# Altium PCB ZYNQ-HS-DEV-PCB.PcbDoc (part 9 of 10)
Units mm, origin at the board's own origin, x right, y up, seen from the top; angles counter-clockwise.
Board outline 125.25 x 111 mm, 10 copper layers (S1 (SIG), S2 (GND), S3 (SIG), S4 (GND), S5 (PWR), S6 (SIG), S7 (GND), S8 (SIG), S9 (GND), S10 (SIG)), stack 1.597 mm thick; 539 components, 408 nets, 2443 pads, 876 vias.
Unrouted connection lines stored in the file: 1310.
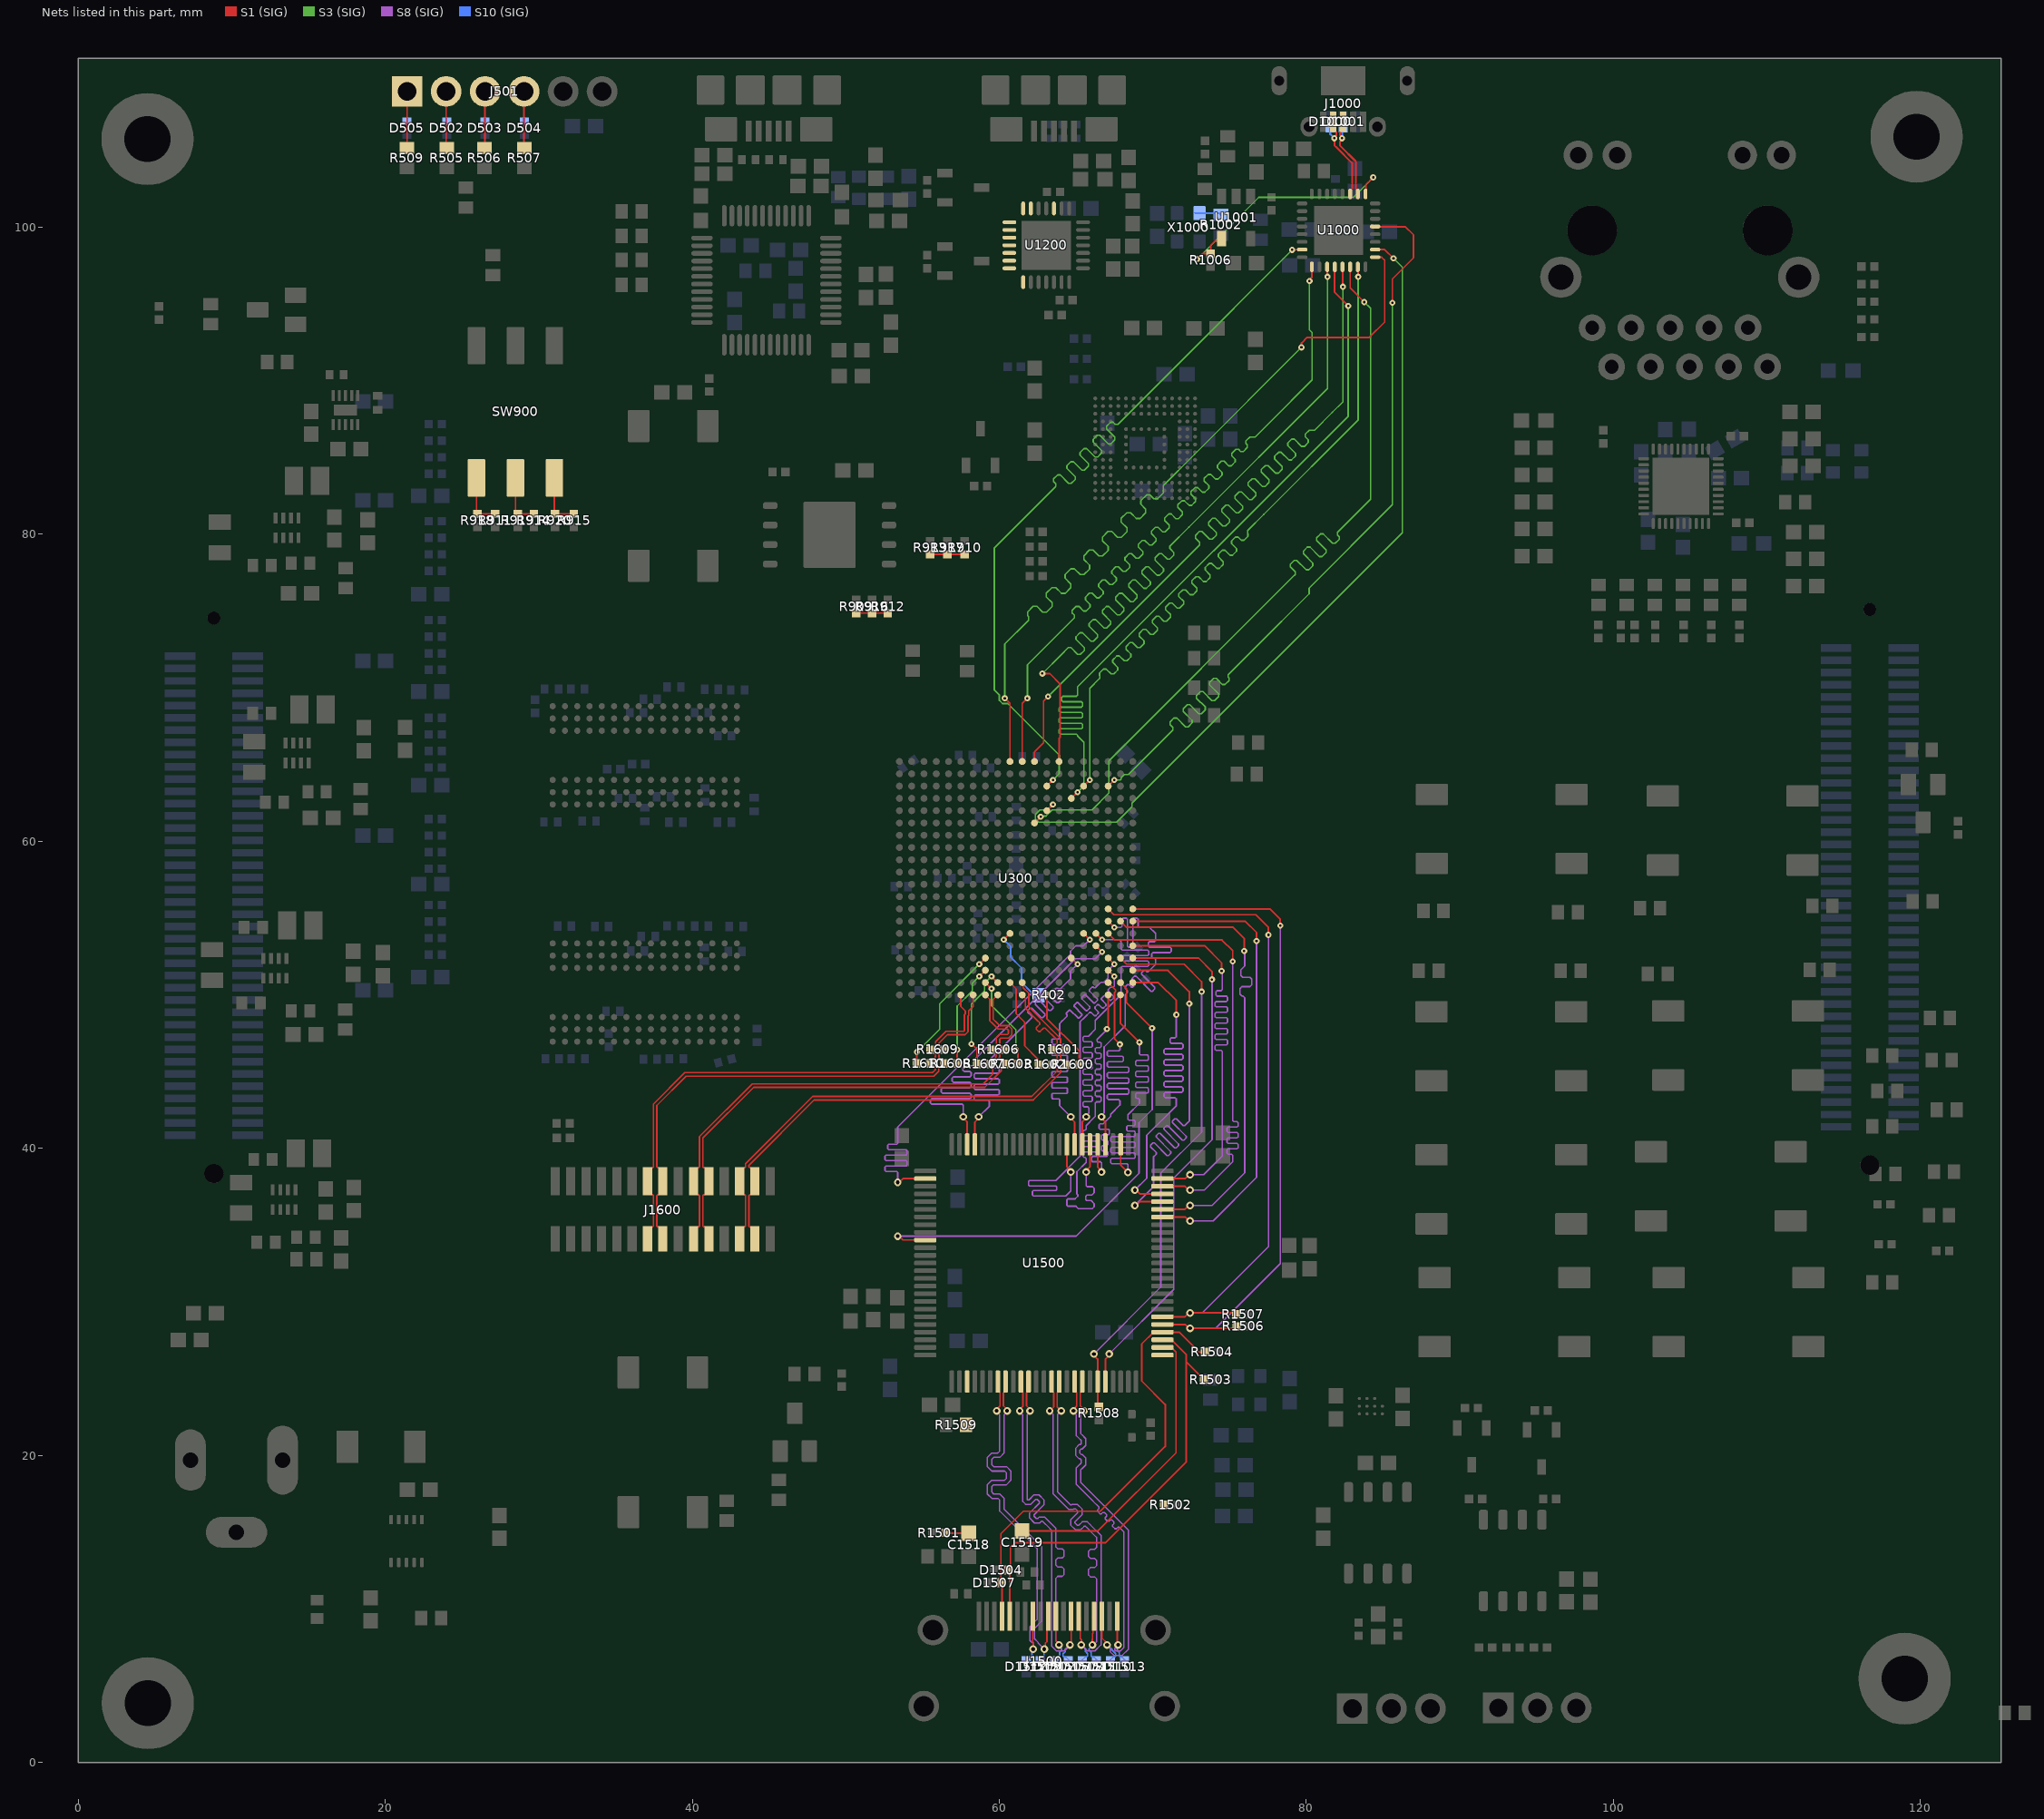
[diagram p13: the nets of this part, all layers, seen from the top]

## Via types
v1: diameter 0.4, hole 0.15, S1 (SIG) to S10 (SIG), tented both sides, 746 vias
v2: diameter 0.5, hole 0.25, S1 (SIG) to S10 (SIG), tented both sides, 108 vias
v3: diameter 0.5, hole 0.2, S1 (SIG) to S10 (SIG), tented both sides, 11 vias
v4: diameter 0.6, hole 0.3, S1 (SIG) to S10 (SIG), tented both sides, 10 vias
v5: diameter 0.45, hole 0.15, S1 (SIG) to S10 (SIG), tented both sides, 1 vias

## Nets (pads, with @x,y where several pads share a name; then routed paths per layer and width w, separated by ;. In a path a pad name is that pad's centre, name@x,y a point inside that pad or via, vN(x,y) a via of type N, cw(c..) or ccw(c..) an arc to the next point about the centre after c; other vN are vias at no path point) (continued)
HDMI_D3: U300.V18 U1500.85 | length 29.7
  S1 (SIG) w0.11: U1500.85@64.4,40.25 64.4,38.787 64.65,38.537 v2(64.65,38.45) ; U300.V18@67.088,51.595 v1(67.488,51.195)
  S8 (SIG) w0.1: v2(64.65,38.45) 64.65,37.225 64.325,36.9 62.209,36.9 62.15,36.959 62.15,37.191 62.209,37.25 63.666,37.25 63.725,37.309 63.725,37.491 63.666,37.55 61.959,37.55 61.9,37.609 61.9,37.841 61.959,37.9 63.666,37.9 65.25,39.484 65.25,48.225 65.591,48.566 65.877,48.852 65.977,48.852 66.186,48.644 66.286,48.644 66.436,48.794 66.436,48.894 66.228,49.102 66.228,49.203 66.378,49.353 66.478,49.353 66.686,49.144 66.787,49.144 66.937,49.295 66.937,49.395 66.649,49.682 66.649,49.782 66.799,49.932 66.899,49.932 67.187,49.645 67.287,49.645 67.437,49.795 67.437,49.895 67.088,50.245 67.088,50.345 67.238,50.495 67.417,50.495 67.488,50.566 67.488,51.161 v1(67.488,51.195)
HDMI_D4: U300.U18 U1500.84 | length 29.5
  S1 (SIG) w0.11: v2(64.65,42.05) 64.65,41.963 64.9,41.713 U1500.84@64.9,40.25 ; U300.U18@67.088,52.395 v1(67.488,51.995)
  S8 (SIG) w0.1: v2(64.65,42.05) 63.925,42.775 63.925,43.075 63.925,43.125 ccw(c63.825,43.125) 63.825,43.225 63.496,43.225 cw(c63.496,43.296) 63.425,43.296 63.425,43.508 cw(c63.496,43.508) 63.496,43.579 64.357,43.579 ccw(c64.357,43.65) 64.428,43.65 64.428,43.862 ccw(c64.357,43.862) 64.357,43.933 63.496,43.933 cw(c63.496,44.004) 63.425,44.004 63.425,44.216 cw(c63.496,44.216) 63.496,44.287 64.357,44.287 ccw(c64.357,44.358) 64.428,44.358 64.428,44.57 ccw(c64.357,44.57) 64.357,44.641 63.496,44.641 cw(c63.496,44.712) 63.425,44.712 63.425,44.924 cw(c63.496,44.924) 63.496,44.995 64.357,44.995 ccw(c64.357,45.066) 64.428,45.066 64.428,45.278 ccw(c64.357,45.278) 64.357,45.349 63.496,45.349 cw(c63.496,45.42) 63.425,45.42 63.425,45.632 cw(c63.496,45.632) 63.496,45.703 64.357,45.703 ccw(c64.357,45.774) 64.428,45.774 64.428,45.986 ccw(c64.357,45.986) 64.357,46.057 63.496,46.057 cw(c63.496,46.128) 63.425,46.128 63.425,46.34 cw(c63.496,46.34) 63.496,46.411 64.357,46.411 ccw(c64.357,46.482) 64.428,46.482 64.428,46.694 ccw(c64.357,46.694) 64.357,46.765 63.496,46.765 cw(c63.496,46.836) 63.425,46.836 63.425,47.048 cw(c63.496,47.048) 63.496,47.119 63.825,47.119 ccw(c63.825,47.219) 63.925,47.219 63.925,47.7 63.925,48.127 64.124,48.326 64.14,48.342 64.349,48.551 64.384,48.586 ccw(c64.314,48.657) 64.384,48.728 64.375,48.737 cw(c64.425,48.787) 64.375,48.837 64.526,48.987 cw(c64.576,48.937) 64.626,48.987 65.113,48.5 ccw(c65.163,48.55) 65.213,48.5 65.363,48.65 ccw(c65.313,48.7) 65.363,48.75 64.876,49.237 cw(c64.926,49.288) 64.876,49.338 65.026,49.488 cw(c65.076,49.438) 65.126,49.488 65.628,48.986 ccw(c65.678,49.036) 65.728,48.986 65.878,49.136 ccw(c65.828,49.186) 65.878,49.236 65.377,49.738 cw(c65.427,49.788) 65.377,49.838 65.527,49.988 cw(c65.577,49.938) 65.627,49.988 66.129,49.487 ccw(c66.179,49.537) 66.229,49.487 66.379,49.637 ccw(c66.329,49.687) 66.379,49.737 65.877,50.239 cw(c65.927,50.289) 65.877,50.339 66.027,50.489 cw(c66.077,50.439) 66.128,50.489 66.137,50.48 ccw(c66.207,50.551) 66.278,50.48 66.615,50.817 66.804,50.817 66.808,50.82 67.081,51.094 67.081,51.589 v1(67.488,51.995)
HDMI_D5: U300.R17 U1500.83 | length 30.1
  S1 (SIG) w0.11: U1500.83@65.4,40.25 65.4,41.713 65.65,41.963 v2(65.65,42.05) ; U300.R17@66.288,53.995 v1(66.688,53.595)
  S8 (SIG) w0.1: v2(65.65,42.05) 65.65,42.134 65.825,42.309 65.825,42.575 65.825,42.625 65.754,42.696 65.521,42.696 65.45,42.767 65.45,42.979 65.521,43.05 65.979,43.05 66.05,43.121 66.05,43.333 65.979,43.404 65.521,43.404 65.45,43.475 65.45,43.687 65.521,43.758 65.979,43.758 66.05,43.829 66.05,44.041 65.979,44.112 65.521,44.112 65.45,44.183 65.45,44.395 65.521,44.466 65.979,44.466 66.05,44.537 66.05,44.749 65.979,44.82 65.521,44.82 65.45,44.891 65.45,45.103 65.521,45.174 65.979,45.174 66.05,45.245 66.05,45.457 65.979,45.528 65.521,45.528 65.45,45.599 65.45,45.811 65.521,45.882 65.979,45.882 66.05,45.953 66.05,46.165 65.979,46.236 65.521,46.236 65.45,46.307 65.45,46.519 65.521,46.59 65.979,46.59 66.05,46.661 66.05,46.873 65.979,46.944 65.521,46.944 65.45,47.015 65.45,47.227 65.521,47.298 65.798,47.298 66.25,47.75 66.25,48.325 67.938,50.013 67.938,51.371 67.938,51.775 68.008,51.846 69.657,51.846 69.727,51.917 69.727,52.129 69.657,52.2 67.848,52.2 67.778,52.271 67.778,52.483 67.848,52.554 69.657,52.554 69.727,52.625 69.727,52.837 69.657,52.908 68.008,52.908 67.938,52.979 67.938,53.458 67.938,53.463 67.806,53.595 v1(66.688,53.595)
HDMI_D6: U300.Y18 U1500.82 | length 29.8
  S1 (SIG) w0.11: v2(65.65,38.45) 65.65,38.537 65.9,38.787 U1500.82@65.9,40.25 ; v1(67,47.775) 67,47.853 67.088,47.941 U300.Y18@67.088,49.995
  S8 (SIG) w0.1: v2(65.65,38.45) 65.65,37.559 65.709,37.5 66.075,37.5 66.175,37.4 66.175,37.1 66.025,36.95 65.7,36.95 65.625,36.875 65.625,36.659 65.684,36.6 65.975,36.6 66.175,36.4 66.175,36.2 66.05,36.075 65.134,36.075 64.984,36.225 64.459,36.225 64.4,36.284 64.4,36.641 64.459,36.7 64.925,36.7 65.109,36.884 65.109,36.966 65.05,37.025 65.05,38.475 65.65,39.075 65.65,39.286 65.65,39.336 65.579,39.406 65.521,39.406 65.45,39.477 65.45,39.69 65.521,39.76 66.379,39.76 66.45,39.831 66.45,40.044 66.379,40.114 65.521,40.114 65.45,40.185 65.45,40.398 65.521,40.468 66.379,40.468 66.45,40.539 66.45,40.752 66.379,40.822 65.521,40.822 65.45,40.893 65.45,41.106 65.521,41.176 65.579,41.176 65.65,41.247 65.65,41.484 66.172,42.007 66.25,42.084 66.25,42.55 66.25,42.954 66.321,43.025 66.554,43.025 66.625,43.096 66.625,43.308 66.554,43.379 66.316,43.379 66.245,43.45 66.245,43.662 66.316,43.733 66.554,43.733 66.625,43.804 66.625,44.016 66.554,44.087 66.316,44.087 66.245,44.158 66.245,44.37 66.316,44.441 66.554,44.441 66.625,44.512 66.625,44.724 66.554,44.795 66.316,44.795 66.245,44.866 66.245,45.078 66.316,45.149 66.554,45.149 66.625,45.22 66.625,45.432 66.554,45.503 66.316,45.503 66.245,45.574 66.245,45.786 66.316,45.857 66.554,45.857 66.625,45.928 66.625,46.14 66.554,46.211 66.316,46.211 66.245,46.282 66.245,46.494 66.316,46.565 66.554,46.565 66.625,46.636 66.625,46.848 66.554,46.919 66.431,46.919 66.36,46.99 66.36,47.09 66.945,47.675 67,47.73 v1(67,47.775)
HDMI_D7: U300.W18 U1500.81 | length 30.1
  S1 (SIG) w0.11: U1500.81@66.4,40.25 66.4,38.787 66.65,38.537 v2(66.65,38.45) ; U300.W18@67.088,50.795 67.573,50.309 67.573,50.218 67.508,50.152 67.508,47.117 v1(67.85,46.775)
  S8 (SIG) w0.1: v2(66.65,38.45) 66.65,39 66.65,39.05 66.579,39.121 66.077,39.121 66.006,39.192 66.006,39.404 66.077,39.475 66.984,39.475 67.055,39.546 67.055,39.758 66.984,39.829 66.721,39.829 66.65,39.9 66.65,40.112 66.721,40.183 66.984,40.183 67.055,40.254 67.055,40.466 66.984,40.537 66.721,40.537 66.65,40.608 66.65,40.82 66.721,40.891 67.097,40.891 67.168,40.962 67.168,41.174 67.097,41.245 66.571,41.245 66.5,41.316 66.5,41.528 66.571,41.599 66.765,41.599 67.25,42.084 67.25,42.216 67.85,42.816 67.85,43.05 67.85,43.1 67.779,43.171 67.096,43.171 67.025,43.242 67.025,43.454 67.096,43.525 68.354,43.525 68.425,43.596 68.425,43.808 68.354,43.879 67.096,43.879 67.025,43.95 67.025,44.162 67.096,44.233 68.354,44.233 68.425,44.304 68.425,44.516 68.354,44.587 67.096,44.587 67.025,44.658 67.025,44.87 67.096,44.941 68.354,44.941 68.425,45.012 68.425,45.224 68.354,45.295 67.096,45.295 67.025,45.366 67.025,45.578 67.096,45.649 68.006,45.649 68.077,45.72 68.077,45.932 68.006,46.003 67.096,46.003 67.025,46.074 67.025,46.286 67.096,46.357 67.779,46.357 67.85,46.428 67.85,46.566 v1(67.85,46.775)
HDMI_D8: U300.P18 U1500.80 | length 30.3
  S1 (SIG) w0.11: v2(66.65,42.05) 66.65,41.963 66.9,41.713 U1500.80@66.9,40.25 ; U300.P18@67.088,54.795 v1(67.488,54.395)
  S8 (SIG) w0.1: v2(66.65,42.05) 66.65,42.134 66.825,42.309 66.825,46.6 68.2,47.975 68.2,48.45 68.2,50.002 68.314,50.116 68.349,50.152 68.349,50.252 68.188,50.413 68.188,50.514 68.338,50.664 68.438,50.664 68.6,50.502 68.7,50.502 68.85,50.652 68.85,50.752 68.645,50.957 68.645,51.057 68.795,51.208 68.895,51.208 69.873,50.23 69.973,50.23 70.123,50.381 70.123,50.481 69.266,51.338 69.266,51.438 69.416,51.588 69.516,51.588 69.601,51.503 69.701,51.503 70.175,51.977 70.175,52.05 70.175,52.275 70.175,52.325 70.104,52.396 69.998,52.396 69.927,52.467 69.927,52.679 69.998,52.75 71.12,52.75 71.191,52.821 71.191,53.033 71.12,53.104 69.767,53.104 69.696,53.175 69.696,53.387 69.767,53.458 70.104,53.458 70.175,53.529 70.175,53.931 70.175,54 69.78,54.395 69.114,54.395 69.043,54.466 69.043,54.924 68.972,54.995 68.76,54.995 68.689,54.924 68.689,53.179 68.618,53.108 68.406,53.108 68.335,53.179 68.335,54.924 68.264,54.995 68.052,54.995 67.981,54.924 67.981,54.466 67.91,54.395 67.86,54.395 v1(67.488,54.395)
HDMI_D9: U300.Y19 U1500.78 | length 30.2
  S1 (SIG) w0.11: U300.Y19@67.888,49.995 67.888,48.137 v1(69.125,46.9) ; U1500.78@67.9,40.25 67.9,38.9 v2(68.375,38.425)
  S8 (SIG) w0.1: v2(68.375,38.425) 68.375,38.875 68.375,38.925 68.304,38.996 67.326,38.996 67.255,39.067 67.255,39.279 67.326,39.35 68.779,39.35 68.85,39.421 68.85,39.633 68.779,39.704 67.326,39.704 67.255,39.775 67.255,39.987 67.326,40.058 68.779,40.058 68.85,40.129 68.85,40.341 68.779,40.412 67.326,40.412 67.255,40.483 67.255,40.695 67.326,40.766 68.779,40.766 68.85,40.837 68.85,41.049 68.779,41.12 68.371,41.12 68.3,41.191 68.3,41.403 68.371,41.474 68.779,41.474 68.85,41.545 68.85,41.757 68.779,41.828 68.446,41.828 68.375,41.899 68.375,42.045 68.375,42.192 69.125,42.942 69.125,43.124 69.125,43.174 69.054,43.244 68.949,43.244 68.878,43.315 68.878,43.528 68.949,43.598 69.638,43.598 69.709,43.669 69.709,43.882 69.638,43.952 68.949,43.952 68.878,44.023 68.878,44.236 68.949,44.306 69.638,44.306 69.709,44.377 69.709,44.59 69.638,44.66 68.949,44.66 68.878,44.731 68.878,44.944 68.949,45.014 69.638,45.014 69.709,45.085 69.709,45.298 69.638,45.368 68.949,45.368 68.878,45.439 68.878,45.652 68.949,45.722 69.638,45.722 69.709,45.793 69.709,46.006 69.638,46.076 69.196,46.076 69.125,46.147 69.125,46.406 v1(69.125,46.9)
HDMI_D10: U300.T20 U1500.74 | length 31.2
  S1 (SIG) w0.11: U300.T20@68.688,53.195 73.355,53.195 74.475,52.075 v1(74.475,51.55) ; U1500.74@70.625,38.025 72.088,38.025 72.338,38.275 v2(72.425,38.275)
  S8 (SIG) w0.1: v2(72.425,38.275) 73.3,38.275 74.513,39.488 74.513,46.256 74.513,46.306 74.442,46.377 74.121,46.377 74.05,46.447 74.05,46.66 74.121,46.731 74.788,46.731 74.859,46.801 74.859,47.014 74.788,47.085 74.121,47.085 74.05,47.155 74.05,47.368 74.121,47.439 74.788,47.439 74.859,47.509 74.859,47.722 74.788,47.793 74.121,47.793 74.05,47.863 74.05,48.076 74.121,48.147 74.788,48.147 74.859,48.217 74.859,48.43 74.788,48.5 74.121,48.5 74.05,48.571 74.05,48.784 74.121,48.854 74.788,48.854 74.859,48.925 74.859,49.138 74.788,49.208 74.121,49.208 74.05,49.279 74.05,49.492 74.121,49.562 74.788,49.562 74.859,49.633 74.859,49.846 74.788,49.916 74.182,49.916 74.111,49.987 74.111,50.2 74.182,50.27 74.442,50.27 74.513,50.341 74.513,51.075 74.513,51.512 v1(74.475,51.55)
HDMI_D11: U300.R18 U1500.73 | length 31.6
  S1 (SIG) w0.11: U300.R18@67.088,53.995 67.508,53.575 74.5,53.575 75.2,52.875 v1(75.2,52.175) ; U1500.73@70.625,37.525 72.088,37.525 72.338,37.275 v2(72.425,37.275)
  S8 (SIG) w0.1: v2(72.425,37.275) 73.35,37.275 75.2,39.125 75.2,39.487 75.2,39.537 75.129,39.608 74.897,39.608 74.826,39.679 74.826,39.891 74.897,39.962 75.482,39.962 75.553,40.033 75.553,40.245 75.482,40.316 74.897,40.316 74.826,40.387 74.826,40.599 74.897,40.67 75.482,40.67 75.553,40.741 75.553,40.953 75.482,41.024 74.897,41.024 74.826,41.095 74.826,41.307 74.897,41.378 75.482,41.378 75.553,41.449 75.553,41.661 75.482,41.732 75.271,41.732 75.2,41.803 75.2,43.335 v1(75.2,52.175)
HDMI_D12: U300.W20 U1500.72 | length 30.9
  S1 (SIG) w0.11: U300.W20@68.688,50.795 70.355,50.795 71.525,49.625 v1(71.525,48.7) ; v2(68.825,37.275) 68.912,37.275 69.162,37.025 U1500.72@70.625,37.025
  S8 (SIG) w0.1: v2(68.825,37.275) 69.6,38.05 69.6,40.85 71.525,42.775 71.525,43.175 71.525,43.225 71.454,43.296 70.793,43.296 70.722,43.367 70.722,43.579 70.793,43.65 71.888,43.65 71.958,43.721 71.958,43.933 71.888,44.004 70.793,44.004 70.722,44.075 70.722,44.287 70.793,44.358 71.888,44.358 71.958,44.429 71.958,44.641 71.888,44.712 70.793,44.712 70.722,44.783 70.722,44.995 70.793,45.066 71.888,45.066 71.958,45.137 71.958,45.349 71.888,45.42 70.793,45.42 70.722,45.491 70.722,45.703 70.793,45.774 71.888,45.774 71.958,45.845 71.958,46.057 71.888,46.128 70.793,46.128 70.722,46.199 70.722,46.411 70.793,46.482 71.888,46.482 71.958,46.553 71.958,46.765 71.888,46.836 71.19,46.836 71.119,46.907 71.119,47.119 71.19,47.19 71.454,47.19 71.525,47.261 71.525,48.2 v1(71.525,48.7)
HDMI_D13: U300.V20 U1500.71 | length 31
  S1 (SIG) w0.11: U300.V20@68.688,51.595 70.98,51.595 72.375,50.2 v1(72.375,49.425) ; v2(68.825,36.275) 68.912,36.275 69.162,36.525 U1500.71@70.625,36.525
  S8 (SIG) w0.1: v2(68.825,36.275) 70.037,37.487 70.037,39.437 70.188,39.587 70.223,39.623 70.223,39.723 69.85,40.096 69.85,40.196 70,40.346 70.1,40.346 70.918,39.529 71.018,39.529 71.168,39.679 71.168,39.779 70.218,40.729 70.218,40.829 70.368,40.979 70.469,40.979 71.419,40.029 71.519,40.029 71.669,40.179 71.669,40.28 70.719,41.23 70.719,41.33 70.869,41.48 70.969,41.48 71.919,40.53 72.019,40.53 72.169,40.68 72.169,40.78 71.276,41.674 71.276,41.774 71.426,41.924 71.526,41.924 71.975,41.475 72.075,41.475 72.275,41.675 72.375,41.775 v1(72.375,49.425)
HDMI_D14: U300.P19 U1500.70 | length 31.6
  S1 (SIG) w0.11: U300.P19@67.888,54.795 68.288,54.395 75.23,54.395 75.95,53.675 v1(75.95,52.85) ; U1500.70@70.625,36.025 72.088,36.025 72.338,36.275 v2(72.425,36.275)
  S8 (SIG) w0.1: v2(72.425,36.275) 73.85,36.275 75.978,38.403 75.978,49.75 75.978,49.8 75.857,49.922 75.794,49.922 75.672,50.044 75.672,50.408 75.794,50.53 76.324,50.53 76.445,50.652 76.445,51.016 76.324,51.138 75.854,51.138 75.733,51.26 75.733,51.624 75.854,51.746 75.857,51.746 75.978,51.868 75.978,52.425 75.978,52.822 v1(75.95,52.85)
HDMI_D15: U300.P20 U1500.69 | length 31.7
  S1 (SIG) w0.11: U300.P20@68.688,54.795 76.005,54.795 76.75,54.05 v1(76.75,53.5) ; U1500.69@70.625,35.525 72.088,35.525 72.338,35.275 v2(72.425,35.275)
  S8 (SIG) w0.1: v2(72.425,35.275) 73.925,35.275 76.75,38.1 v1(76.75,53.5)
HDMI_DDCSCL: D1504.2 J1500.15 R1503.1 U1500.53 | length 28.9
  S1 (SIG) w0.11: J1500.15@60.675,9.513 60.675,12.4 D1504.2@60.55,12.525 60.72,12.695 60.72,14.014 61.006,14.3 66.9,14.3 72.175,19.575 72.175,26.085 ; U1500.53@70.625,27.525 71.2,27.525 72.175,26.55 72.175,26.085 ; R1503.1@73.325,24.935 72.175,26.085
HDMI_DDCSDA: D1507.2 J1500.16 R1504.1 U1500.54 | length 30.8
  S1 (SIG) w0.11: J1500.16@60.175,9.513 60.175,11.625 D1507.2@60.1,11.7 60.1,14.894 61.56,16.354 66.579,16.354 70.8,20.575 70.8,23.312 69.275,24.837 69.275,27.25 70.05,28.025 U1500.54@70.625,28.025 71.725,28.025 73.024,26.726 R1504.1@73.4,26.725
HDMI_DE: U300.U15 U1500.97 | length 30.3
  S1 (SIG) w0.11: U1500.97@58.4,40.25 58.4,41.713 58.65,41.963 v2(58.65,42.05) ; U300.U15@64.688,52.395 v1(65.088,51.995)
  S8 (SIG) w0.1: v2(58.65,42.05) 59.35,42.75 59.35,43 59.35,43.05 59.279,43.121 58.428,43.121 58.358,43.192 58.358,43.404 58.428,43.475 59.929,43.475 60,43.546 60,43.758 59.929,43.829 58.428,43.829 58.358,43.9 58.358,44.112 58.428,44.183 59.929,44.183 60,44.254 60,44.466 59.929,44.537 58.428,44.537 58.358,44.608 58.358,44.82 58.428,44.891 59.929,44.891 60,44.962 60,45.174 59.929,45.245 59.421,45.245 59.35,45.316 59.35,45.633 59.35,45.762 62.069,48.481 62.104,48.516 62.104,48.617 61.851,48.87 61.851,48.97 62.001,49.12 62.101,49.12 62.721,48.5 62.822,48.5 62.972,48.65 62.972,48.75 62.351,49.371 62.351,49.471 62.502,49.621 62.602,49.621 63.241,48.982 63.341,48.982 63.491,49.132 63.491,49.232 62.852,49.871 62.852,49.971 63.002,50.122 63.102,50.122 63.741,49.483 63.842,49.483 63.992,49.633 63.992,49.733 63.555,50.17 63.555,50.27 63.705,50.42 63.805,50.42 63.856,50.369 63.957,50.369 64.191,50.603 64.638,51.05 64.638,51.545 v1(65.088,51.995)
HDMI_HEAC_N: C1518.1 R1501.1 U1500.51 | length 1.5
  S1 (SIG) w0.11: R1501.1@56.475,14.95 56.5,14.925 C1518.1@58,14.925
HDMI_HEAC_P: C1519.1 R1502.1 U1500.52 | length 19.7
  S1 (SIG) w0.11: C1519.1@61.475,15.075 66.425,15.075 71.505,20.155 71.505,26.72 71.2,27.025 U1500.52@70.625,27.025
HDMI_HSYNC: U300.T17 U1500.98 | length 30.3
  S1 (SIG) w0.11: v2(57.65,42.05) 57.65,41.963 57.9,41.713 U1500.98@57.9,40.25 ; U300.T17@66.288,53.195 v1(66.688,52.795)
  S8 (SIG) w0.1: v2(57.65,42.05) 57.65,42.757 57.65,42.807 57.579,42.878 55.573,42.878 55.502,42.948 55.502,43.161 55.573,43.232 58.087,43.232 58.158,43.302 58.158,43.515 58.087,43.586 56.281,43.586 56.21,43.656 56.21,43.869 56.281,43.94 58.087,43.94 58.158,44.01 58.158,44.223 58.087,44.294 56.989,44.294 56.918,44.364 56.918,44.577 56.989,44.648 58.087,44.648 58.158,44.718 58.158,44.931 58.087,45.002 57.697,45.002 57.626,45.072 57.626,45.285 57.697,45.356 58.984,45.356 59.055,45.426 59.055,45.639 58.984,45.71 58.549,45.71 58.478,45.78 58.478,45.88 58.798,46.2 61.048,48.45 64.943,52.345 66.238,52.345 v1(66.688,52.795)
HDMI_I2C_SCL: R1506.1 U300.N20 U1500.55 | length 44.9
  S1 (SIG) w0.11: U300.N20@68.688,55.595 77.627,55.595 78.281,54.941 78.281,54.519 v1(78.3,54.5) ; U1500.55@70.625,28.525 72.088,28.525 72.338,28.275 v2(72.425,28.275) 75.325,28.275 R1506.1@75.45,28.4
  S8 (SIG) w0.1: v2(72.425,28.275) 74.075,28.275 78.3,32.5 v1(78.3,54.5)
HDMI_I2C_SDA: R1507.1 U300.N18 U1500.56 | length 43.6
  S1 (SIG) w0.11: U300.N18@67.088,55.595 67.468,55.215 76.71,55.215 77.525,54.4 v1(77.525,53.9) ; U1500.56@70.625,29.025 72.088,29.025 72.338,29.275 v2(72.425,29.275) 75.325,29.275 R1507.1@75.425,29.175
  S8 (SIG) w0.1: v2(72.425,29.275) 73.2,29.275 77.525,33.6 v1(77.525,53.9)
HDMI_INT: R1508.1 U300.U19 U1500.45 | length 36.7
  S1 (SIG) w0.11: v2(66.15,26.6) 66.15,26.513 66.4,26.263 U1500.45@66.4,24.8 66.4,23.225 R1508.1@66.475,23.15 ; U300.U19@67.888,52.395 68.288,51.995 72.03,51.995 73.175,50.85 v1(73.175,50.2)
  S8 (SIG) w0.1: v2(66.15,26.6) 70.517,30.967 70.517,38.392 73.175,41.05 v1(73.175,50.2)
HDMI_REXT: R1509.2 U1500.28
HDMI_SPDIF: U300.W19 U1500.10 | length 33
  S1 (SIG) w0.11: v2(53.375,34.275) 53.462,34.275 53.712,34.025 U1500.10@55.175,34.025 ; U300.W19@67.888,50.795 68.288,50.395 68.288,49.487 v1(69.95,47.825)
  S8 (SIG) w0.1: v2(53.375,34.275) 65,34.275 69.1,38.375 69.1,41.671 69.95,42.521 v1(69.95,47.825)
HDMI_SPDIF_OUT: U300.U20 U1500.46 | length 35.1
  S1 (SIG) w0.11: U1500.46@66.9,24.8 66.9,26.263 67.15,26.513 v2(67.15,26.6) ; U300.U20@68.688,52.395 72.98,52.395 73.85,51.525 v1(73.85,51)
  S8 (SIG) w0.1: v2(67.15,26.6) 71.357,30.807 71.357,38.059 73.85,40.553 v1(73.85,51)
HDMI_TX0_N: D1505.2 J1500.7 U1500.35 | length 24.9
  S1 (SIG) w0.1: v2(61.325,22.9) 61.325,23.008 61.537,23.22 61.537,24.075 61.4,24.211 U1500.35@61.4,24.8 ; v2(64.604,7.65) 64.675,7.721 J1500.7@64.675,9.513
  S8 (SIG) w0.09: v2(61.325,22.9) 61.325,22.835 61.518,22.642 61.518,16.997 61.53,16.985 61.707,16.808 62.044,16.808 62.365,17.129 62.463,17.129 62.609,16.983 62.609,16.886 61.968,16.245 61.968,15.908 62.284,15.592 62.621,15.592 62.724,15.694 62.821,15.694 63.302,15.212 63.395,15.12 63.395,7.575 63.715,7.255 64.209,7.255 v2(64.604,7.65)
  S10 (SIG) w0.1: D1505.2@64.493,6.675 64.293,6.875 64.208,6.875 64.149,6.934 64.149,7.079 64.285,7.215 64.285,7.346 64.588,7.65 v2(64.604,7.65)
HDMI_TX0_P: D1502.2 J1500.9 U1500.36 | length 24.9
  S1 (SIG) w0.1: U1500.36@61.9,24.8 61.9,24.211 61.764,24.075 61.764,23.229 62,22.993 v2(62,22.9) ; J1500.9@63.675,9.513 63.674,7.909 63.879,7.704 v2(63.879,7.65)
  S8 (SIG) w0.09: v2(62,22.9) 62,22.835 61.808,22.642 61.808,17.262 61.808,17.117 61.827,17.098 61.924,17.098 62.245,17.419 62.583,17.419 62.899,17.103 62.899,16.766 62.258,16.125 62.258,16.028 62.404,15.882 62.501,15.882 62.603,15.984 62.941,15.984 63.508,15.417 63.685,15.24 63.685,14.075 63.685,14.03 63.805,13.91 64.094,13.91 64.214,13.791 64.214,13.432 64.094,13.312 63.805,13.312 63.685,13.193 63.685,12.834 63.805,12.714 64.094,12.714 64.214,12.595 64.214,12.236 64.094,12.116 63.805,12.116 63.685,11.997 63.685,11.805 63.685,7.908 63.879,7.714 v2(63.879,7.65)
  S10 (SIG) w0.1: D1502.2@63.579,6.675 63.779,6.875 63.864,6.875 63.922,6.934 63.922,7.173 64.058,7.309 64.058,7.391 63.879,7.571 v2(63.879,7.65)
HDMI_TX1_N: D1511.2 J1500.4 U1500.39 | length 24.9
  S1 (SIG) w0.1: v2(63.275,22.9) 63.537,23.161 63.537,23.831 63.537,24.075 63.4,24.211 U1500.39@63.4,24.8 ; v2(66.057,7.65) 66.057,8.02 66.075,8.038 66.075,8.387 66.101,8.413 66.101,9.405 66.075,9.43 J1500.4@66.157,9.513
  S8 (SIG) w0.09: v2(63.275,22.9) 63.275,22.89 63.505,22.66 63.505,17.485 64.045,16.945 64.502,16.488 64.839,16.488 64.863,16.512 64.96,16.512 65.106,16.366 65.106,16.269 64.637,15.799 64.637,15.462 64.952,15.146 65.29,15.146 65.518,15.374 65.616,15.374 65.707,15.282 66.326,14.664 66.326,14.641 66.326,13.998 66.206,13.878 65.93,13.878 65.81,13.759 65.81,13.4 65.93,13.28 66.206,13.28 66.326,13.161 66.326,12.802 66.206,12.682 65.93,12.682 65.81,12.563 65.81,12.204 65.93,12.084 66.206,12.084 66.326,11.965 66.326,11.75 66.326,7.851 66.124,7.65 v2(66.057,7.65)
  S10 (SIG) w0.1: v2(66.057,7.65) 66.057,7.606 65.842,7.391 65.842,7.309 65.978,7.173 65.978,6.934 66.036,6.875 66.121,6.875 D1511.2@66.321,6.675
HDMI_TX1_P: D1508.2 J1500.6 U1500.40 | length 24.9
  S1 (SIG) w0.1: U1500.40@63.9,24.8 63.9,24.211 63.764,24.075 63.764,23.925 63.764,23.161 v2(64.025,22.9) ; J1500.6@65.175,9.513 65.275,9.413 65.275,8.056 65.34,7.991 65.34,7.658 v2(65.332,7.65)
  S8 (SIG) w0.09: v2(64.025,22.9) 64.025,22.89 63.795,22.66 63.795,17.605 64.25,17.15 64.622,16.778 64.719,16.778 64.742,16.802 65.08,16.802 65.396,16.486 65.396,16.148 64.927,15.679 64.927,15.582 65.073,15.436 65.17,15.436 65.398,15.664 65.736,15.664 65.913,15.487 66.616,14.784 66.616,7.65 66.221,7.255 65.727,7.255 v2(65.332,7.65)
  S10 (SIG) w0.1: v2(65.332,7.65) 65.347,7.65 65.615,7.382 65.615,7.215 65.751,7.079 65.751,6.934 65.692,6.875 65.607,6.875 D1508.2@65.407,6.675
HDMI_TX2_N: D1513.2 J1500.1 U1500.42 | length 24.9
  S1 (SIG) w0.1: v2(64.825,22.9) 64.825,23.008 65.037,23.22 65.037,24.075 64.9,24.211 U1500.42@64.9,24.8 ; J1500.1@67.675,9.513 67.675,7.711 v2(67.736,7.65)
  S8 (SIG) w0.09: v2(64.825,22.9) 64.825,22.835 65.018,22.642 65.018,21.528 65.018,21.278 65.256,21.039 65.266,21.039 65.335,20.97 65.335,20.764 65.266,20.695 65.199,20.695 64.96,20.456 64.96,20.01 65.199,19.771 65.266,19.771 65.335,19.702 65.335,19.496 65.266,19.427 65.256,19.427 65.018,19.188 65.018,18.803 65.018,18.097 66.054,17.061 66.085,17.03 66.494,16.621 66.494,16.523 66.406,16.435 66.406,16.338 66.552,16.192 66.649,16.192 66.737,16.28 66.835,16.28 66.981,16.134 66.981,16.037 66.892,15.948 66.892,15.851 67.038,15.705 67.135,15.705 67.224,15.794 67.321,15.794 67.467,15.648 67.467,15.55 67.379,15.462 67.379,15.365 67.525,15.219 67.622,15.219 67.71,15.307 67.808,15.307 67.839,15.275 68.121,14.994 68.121,7.491 67.886,7.256 67.571,7.256 67.518,7.309 67.518,7.398 67.736,7.615 v2(67.736,7.65)
  S10 (SIG) w0.1: v2(67.736,7.65) 67.667,7.581 67.667,7.309 67.806,7.169 67.806,6.934 67.865,6.875 67.95,6.875 D1513.2@68.15,6.675
HDMI_TX2_P: D1510.2 J1500.3 U1500.43 | length 25
  S1 (SIG) w0.1: U1500.43@65.4,24.8 65.4,24.211 65.264,24.075 65.264,23.229 65.5,22.993 v2(65.5,22.9) ; J1500.3@66.675,9.513 66.675,8.094 67.011,7.758 v2(67.011,7.65)
  S8 (SIG) w0.09: v2(65.5,22.9) 65.5,22.835 65.308,22.642 65.308,21.528 65.308,21.398 65.376,21.329 65.386,21.329 65.625,21.09 65.625,20.644 65.386,20.405 65.319,20.405 65.25,20.336 65.25,20.13 65.319,20.061 65.386,20.061 65.625,19.822 65.625,19.376 65.386,19.137 65.376,19.137 65.308,19.068 65.308,18.803 65.308,18.217 68.411,15.114 68.411,7.37 68.006,6.966 67.451,6.966 67.228,7.189 67.228,7.398 67.011,7.615 v2(67.011,7.65)
  S10 (SIG) w0.1: v2(67.011,7.65) 67.026,7.65 67.335,7.341 67.335,7.32 67.579,7.075 67.579,6.934 67.521,6.875 67.436,6.875 D1510.2@67.236,6.675
HDMI_TX_CLK_N: D1512.2 J1500.12 U1500.32 | length 25.2
  S1 (SIG) w0.1: v2(59.825,22.9) 59.825,23.008 60.037,23.22 60.037,24.075 59.9,24.211 U1500.32@59.9,24.8 ; J1500.12@62.175,9.513 62.175,7.858 62.208,7.825 62.208,7.383 v2(62.2,7.375)
  S8 (SIG) w0.09: v2(59.825,22.9) 59.825,22.835 60.018,22.642 60.018,21.171 60.018,20.269 59.898,20.15 59.505,20.15 59.216,19.86 59.216,19.261 59.505,18.972 60.341,18.972 60.461,18.852 60.461,18.493 60.341,18.374 59.505,18.374 59.216,18.084 59.216,17.485 59.505,17.196 59.898,17.196 60.018,17.076 60.018,16.946 60.018,16.368 62.455,13.93 62.455,9.305 61.99,8.84 61.99,8.506 61.99,7.938 62.221,7.707 62.221,7.396 v2(62.2,7.375)
  S10 (SIG) w0.1: D1512.2@61.75,6.675 61.8,6.675 62.123,6.998 62.123,7.298 v2(62.2,7.375)
HDMI_TX_CLK_P: D1509.2 J1500.10 U1500.33 | length 25.3
  S1 (SIG) w0.1: U1500.33@60.4,24.8 60.4,24.211 60.264,24.075 60.264,23.229 60.5,22.993 v2(60.5,22.9) ; v2(62.925,7.375) 63.002,7.452 63.002,7.76 63.1,7.858 J1500.10@63.1,9.513
  S8 (SIG) w0.09: v2(60.5,22.9) 60.5,22.835 60.308,22.642 60.308,21.171 60.308,20.149 60.018,19.86 59.625,19.86 59.506,19.74 59.506,19.381 59.625,19.262 60.461,19.262 60.751,18.972 60.751,18.373 60.461,18.084 59.625,18.084 59.506,17.964 59.506,17.605 59.625,17.486 60.018,17.486 60.308,17.196 60.308,16.946 60.308,16.488 62.745,14.05 62.745,9.185 62.28,8.72 62.28,8.385 62.28,8.058 62.511,7.827 62.511,7.789 v2(62.925,7.375)
  S10 (SIG) w0.1: D1509.2@62.664,6.675 62.707,6.675 62.907,6.875 62.907,7.357 v2(62.925,7.375)
HDMI_VSYNC: U300.R16 U1500.2 | length 30.3
  S1 (SIG) w0.11: v2(53.375,37.775) 53.462,37.775 53.712,38.025 U1500.2@55.175,38.025 ; U300.R16@65.488,53.995 v1(65.888,53.595)
  S8 (SIG) w0.1: v2(53.375,37.775) 53.375,38.375 53.375,38.425 53.304,38.496 52.616,38.496 52.546,38.567 52.546,38.779 52.616,38.85 53.918,38.85 53.988,38.921 53.988,39.133 53.918,39.204 52.616,39.204 52.546,39.275 52.546,39.487 52.616,39.558 53.918,39.558 53.988,39.629 53.988,39.841 53.918,39.912 52.794,39.912 52.723,39.983 52.723,40.195 52.794,40.266 53.304,40.266 53.375,40.337 53.375,40.925 53.375,41.387 64.638,52.65 64.638,52.84 64.986,53.189 65.481,53.189 v1(65.888,53.595)
HDR_TCK: D504.2 J501.4 R507.2 | length 3.3
  S1 (SIG) w0.11: J501.4@29.035,108.45 29.035,105.165 R507.2@29.05,105.15
HDR_TDI: D502.2 J501.2 R505.2 | length 3.3
  S1 (SIG) w0.11: J501.2@23.955,108.45 23.955,105.195 R505.2@24,105.15
HDR_TDO: D503.2 J501.3 R506.2 | length 3.3
  S1 (SIG) w0.11: R506.2@26.45,105.15 26.495,105.195 J501.3@26.495,108.45
HDR_TMS: D505.2 J501.1 R509.2 | length 3.2
  S1 (SIG) w0.11: R509.2@21.4,105.225 21.415,105.24 J501.1@21.415,108.45
INIT_B_0: R402.1 U300.R10 | length 5.3
  S1 (SIG) w0.11: v1(60.288,53.595) U300.R10@60.688,53.995
  S10 (SIG) w0.11: v1(60.288,53.595) 60.739,53.143 60.739,52.447 61.443,51.743 61.443,50.807 62.049,50.201 62.324,50.201 R402.1@62.55,49.975
LP_CLK_N: R1608.2 U300.V8 | length 6.8
  S1 (SIG) w0.11: R1608.2@57.25,45.525 v1(57.25,46.425) ; v1(58.688,51.195) U300.V8@59.088,51.595
  S3 (SIG) w0.1: v1(57.25,46.425) 57.25,49.262 58.238,50.25 58.238,50.745 v1(58.688,51.195)
LP_CLK_P: R1610.2 U300.U8 | length 8.7
  S1 (SIG) w0.11: R1610.2@54.625,45.525 v1(54.625,46.275) ; v1(58.688,51.995) U300.U8@59.088,52.395
  S3 (SIG) w0.1: v1(54.625,46.275) 56.1,47.75 56.1,48.45 56.1,49.407 v1(58.688,51.995)
LP_LANE0_N: R1600.2 U300.Y13 | length 5.4
  S1 (SIG) w0.11: U300.Y13@63.088,49.995 63.088,48.459 65.2,46.346 R1600.2@65.2,45.45
LP_LANE0_P: R1602.2 U300.W10 | length 6.1
  S1 (SIG) w0.11: U300.W10@60.688,50.795 61.088,50.395 61.088,48.776 61.414,48.45 61.65,48.214 61.65,46.675 62.499,45.826 62.499,45.526 R1602.2@62.575,45.45
LP_LANE1_N: R1603.2 U300.W8 | length 6.2
  S1 (SIG) w0.11: U300.W8@59.088,50.795 v1(59.488,50.395) ; v1(61.075,46.425) 61.075,46.347 61.2,46.222 R1603.2@61.2,45.5
  S3 (SIG) w0.1: v1(59.488,50.395) 59.488,49.312 61.075,47.725 v1(61.075,46.425)
LP_LANE1_P: R1607.2 U300.W9 | length 7
  S1 (SIG) w0.11: v1(58.175,46.8) 58.55,46.425 R1607.2@58.55,45.5 ; v1(59.488,51.195) U300.W9@59.888,50.795
  S3 (SIG) w0.1: v1(58.175,46.8) 58.175,49.387 59.038,50.25 59.038,50.745 v1(59.488,51.195)
M0: R911.1 R918.2 SW900.1 | length 3.6
  S1 (SIG) w0.11: SW900.1@25.936,83.674 25.936,81.329 R918.2@25.993,81.329 R911.1@27.15,81.329
M1: R914.1 R919.2 SW900.2 | length 3.5
  S1 (SIG) w0.11: SW900.2@28.476,83.674 28.476,81.329 R919.2@28.634,81.329 R914.1@29.675,81.329
M2: R915.1 R920.2 SW900.3 | length 3.6
  S1 (SIG) w0.11: SW900.3@31.016,83.674 31.016,81.329 R920.2@31.054,81.329 R915.1@32.282,81.329
M3: R909.1 R912.1 R916.2 | length 2.1
  S1 (SIG) w0.11: R909.1@50.68,74.867 R912.1@52.731,74.867
M4: R910.1 R913.1 R917.2 | length 2.2
  S1 (SIG) w0.11: R913.1@55.495,78.697 R910.1@57.742,78.697
MIPI_CLK_N: J1600.8 J1600.8_1 R1608.1 R1609.2 U300.Y7 | length 35.8
  S1 (SIG) w0.1: J1600.8_1@38.075,34.1 38.075,34.625 37.825,34.875 37.747,34.875 37.688,34.934 37.688,36.916 37.747,36.975 37.825,36.975 38.075,37.225 J1600.8@38.075,37.85 38.075,38.475 37.825,38.725 37.747,38.725 37.688,38.784 37.688,42.788 39.6,44.7 55.733,44.7 56.051,45.018 56.051,45.241 56.11,45.3 56.175,45.3 R1608.1@56.4,45.525 56.175,45.75 56.11,45.75 56.051,45.809 56.051,45.893 56.063,45.906 56.063,46.141 56.122,46.2 56.15,46.2 R1609.2@56.375,46.425 56.15,46.65 56.122,46.65 56.063,46.709 56.063,46.85 56.614,47.4 57.76,47.4 57.952,47.592 57.952,48.612 58.001,48.661 58.001,48.958 58.288,49.245 U300.Y7@58.288,49.995
MIPI_CLK_P: J1600.9 J1600.9_1 R1609.1 R1610.1 U300.Y6 | length 35.8
  S1 (SIG) w0.1: J1600.9_1@37.075,34.1 37.075,34.625 37.325,34.875 37.403,34.875 37.461,34.934 37.461,36.916 37.403,36.975 37.325,36.975 37.075,37.225 J1600.9@37.075,37.85 37.075,38.475 37.325,38.725 37.403,38.725 37.461,38.784 37.461,42.883 39.506,44.927 55.639,44.927 55.824,45.112 55.824,45.241 55.765,45.3 55.7,45.3 R1610.1@55.475,45.525 55.7,45.75 55.765,45.75 55.824,45.809 55.824,45.988 55.836,46 55.836,46.113 R1609.1@55.525,46.425 55.75,46.65 55.778,46.65 55.836,46.709 55.836,46.944 56.519,47.627 57.666,47.627 57.725,47.686 57.725,48.706 57.774,48.755 57.774,48.958 57.488,49.245 U300.Y6@57.488,49.995
MIPI_LANE0_N: J1600.2 J1600.2_1 R1600.1 R1601.2 U300.W11 | length 35.8
  S1 (SIG) w0.1: J1600.2_1@44.075,34.1 44.075,34.625 43.825,34.875 43.747,34.875 43.689,34.934 43.689,36.916 43.747,36.975 43.825,36.975 44.075,37.225 J1600.2@44.075,37.85 44.075,38.475 43.825,38.725 43.747,38.725 43.689,38.784 43.689,38.901 47.938,43.15 62.208,43.15 64.001,44.943 64.001,45.166 64.06,45.225 64.125,45.225 R1600.1@64.35,45.45 64.125,45.675 64.06,45.675 64.001,45.734 64.001,45.957 63.988,45.97 63.988,46.141 64.047,46.2 64.075,46.2 R1601.2@64.3,46.425 64.075,46.65 64.047,46.65 63.988,46.709 63.988,47.144 61.913,49.22 61.913,50.1 61.555,50.458 61.555,50.728 U300.W11@61.488,50.795
MIPI_LANE0_P: J1600.3 J1600.3_1 R1601.1 R1602.1 U300.Y11 | length 35.7
  S1 (SIG) w0.1: J1600.3_1@43.075,34.1 43.075,34.625 43.325,34.875 43.403,34.875 43.462,34.934 43.462,36.916 43.403,36.975 43.325,36.975 43.075,37.225 J1600.3@43.075,37.85 43.075,38.475 43.325,38.725 43.403,38.725 43.462,38.784 43.462,38.995 47.844,43.377 62.114,43.377 63.774,45.037 63.774,45.166 63.715,45.225 63.65,45.225 R1602.1@63.425,45.45 63.65,45.675 63.715,45.675 63.774,45.734 63.774,45.863 63.761,45.876 63.761,46.141 63.703,46.2 63.675,46.2 R1601.1@63.45,46.425 63.675,46.65 63.703,46.65 63.761,46.709 63.761,47.05 63.013,47.798 62.978,47.834 62.878,47.834 62.649,47.605 62.549,47.605 62.399,47.755 62.399,47.855 62.628,48.084 62.628,48.184 62.501,48.311 61.686,49.126 61.686,49.761 61.488,49.959 U300.Y11@61.488,49.995
MIPI_LANE1_N: J1600.5 J1600.5_1 R1603.1 R1606.2 U300.Y9 | length 35.6
  S1 (SIG) w0.1: J1600.5_1@41.075,34.1 41.075,34.625 40.825,34.875 40.747,34.875 40.688,34.934 40.688,36.916 40.747,36.975 40.825,36.975 41.075,37.225 J1600.5@41.075,37.85 41.075,38.475 40.825,38.725 40.747,38.725 40.688,38.784 40.688,40.667 43.996,43.975 59.046,43.975 60.125,45.054 60.125,45.275 R1603.1@60.35,45.5 60.125,45.725 60.047,45.725 59.989,45.784 59.989,45.901 60.026,45.938 60.026,46.141 60.085,46.2 60.112,46.2 R1606.2@60.337,46.425 60.112,46.65 60.085,46.65 60.026,46.709 60.026,46.959 60.026,47.109 60.097,47.18 60.605,47.18 60.809,47.383 60.809,47.784 60.605,47.988 60.016,47.988 59.829,48.175 59.601,48.403 59.601,49.708 U300.Y9@59.888,49.995
MIPI_LANE1_P: J1600.6 J1600.6_1 R1606.1 R1607.1 U300.Y8 | length 35.4
  S1 (SIG) w0.1: J1600.6_1@40.075,34.1 40.075,34.625 40.325,34.875 40.403,34.875 40.461,34.934 40.461,36.916 40.403,36.975 40.325,36.975 40.075,37.225 J1600.6@40.075,37.85 40.075,38.475 40.325,38.725 40.403,38.725 40.461,38.784 40.461,40.761 43.902,44.202 58.952,44.202 59.575,44.825 59.575,45.325 R1607.1@59.4,45.5 59.625,45.725 59.703,45.725 59.762,45.784 59.762,45.995 59.799,46.032 59.799,46.141 59.74,46.2 59.712,46.2 R1606.1@59.487,46.425 59.712,46.65 59.74,46.65 59.799,46.709 59.799,46.959 59.799,47.203 60.003,47.407 60.511,47.407 60.582,47.478 60.582,47.69 60.511,47.761 59.922,47.761 59.508,48.175 59.374,48.309 59.374,49.708 U300.Y8@59.088,49.995
NC: U1200.10 U1200.13 U1200.14 U1200.15 U1200.16 U1200.17 U1200.18 U1200.19 U1200.20 U1200.21 U1200.22
OTG_CLK: U300.A11 U1000.1 | length 53.5
  S1 (SIG) w0.11: U300.A11@61.488,65.195 61.488,68.987 v1(61.825,69.325) ; v1(80.2,96.5) 80.2,96.578 80.35,96.728 80.35,97.4 U1000.1@80.363,97.412
  S3 (SIG) w0.1: v1(61.825,69.325) 61.825,71.5 64.85,74.525 64.885,74.56 64.885,74.732 64.747,74.871 64.747,75.043 65.005,75.301 65.177,75.301 65.475,75.003 65.647,75.003 65.905,75.261 65.905,75.433 65.607,75.731 65.607,75.903 65.865,76.161 66.037,76.161 66.335,75.863 66.507,75.863 66.765,76.121 66.765,76.293 66.466,76.591 66.466,76.763 66.724,77.021 66.896,77.021 67.194,76.722 67.366,76.722 67.624,76.98 67.624,77.152 67.326,77.45 67.326,77.622 67.584,77.88 67.756,77.88 68.054,77.582 68.226,77.582 68.484,77.84 68.484,78.012 68.186,78.31 68.186,78.482 68.444,78.74 68.616,78.74 68.914,78.442 69.086,78.442 69.344,78.7 69.344,78.872 69.046,79.17 69.046,79.342 69.304,79.6 69.476,79.6 69.774,79.302 69.946,79.302 70.204,79.56 70.204,79.732 69.906,80.03 69.906,80.202 70.164,80.46 70.336,80.46 70.634,80.162 70.806,80.162 71.064,80.42 71.064,80.592 70.766,80.89 70.766,81.062 71.024,81.32 71.196,81.32 71.494,81.022 71.666,81.022 71.924,81.28 71.924,81.452 71.625,81.75 71.625,81.922 71.883,82.18 72.055,82.18 72.354,81.881 72.525,81.881 72.783,82.139 72.783,82.311 72.485,82.61 72.485,82.781 72.743,83.039 72.915,83.039 73.213,82.741 73.385,82.741 73.643,82.999 73.643,83.171 73.345,83.469 73.345,83.641 73.603,83.899 73.775,83.899 74.073,83.601 74.245,83.601 74.503,83.859 74.503,84.031 74.205,84.329 74.205,84.501 74.463,84.759 74.635,84.759 74.933,84.461 75.105,84.461 75.363,84.719 75.363,84.891 75.149,85.105 75.149,85.277 75.407,85.535 75.579,85.535 75.719,85.394 75.891,85.394 76.149,85.652 76.149,85.824 76.063,85.91 76.063,86.082 76.321,86.34 76.493,86.34 76.665,86.34 77.638,87.312 80.375,90.05 80.375,93.147 80.2,93.322 v1(80.2,96.5)
OTG_COUT: R1002.2 X1000.3 | length 1.8
  S10 (SIG) w0.11: X1000.3@72.725,100.95 72.75,100.925 74.307,100.925 R1002.2@74.429,100.803
OTG_CPEN: R1006.2 U1000.17 U1001.4 | length 17.4
  S1 (SIG) w0.11: v1(72.875,97.925) 73.227,98.277 R1006.2@73.749,98.277 ; R1006.2@73.775,98.25 73.775,98.819 74.05,99.094 74.319,99.094 U1001.4@74.475,99.25 ; U1000.17@83.838,102.187 83.863,102.213 83.863,102.763 v1(84.35,103.25)
  S3 (SIG) w0.1: v1(72.875,97.925) 76.9,101.95 83.05,101.95 84.325,103.225 v1@84.325,103.275
OTG_D_N: D1000.2 J1000.2 U1000.19 | length 6.1
  S1 (SIG) w0.121: J1000.2@81.75,106.875 81.75,106.4 81.951,106.199 81.951,106.001 81.825,105.875 v1(81.825,105.8) 81.825,105.335 81.951,105.209 82.976,104.184 82.976,102.53 82.85,102.404 U1000.19@82.85,102.175
  S10 (SIG) w0.121: D1000.2@81.55,106.432 81.553,106.429 81.553,106.072 v1(81.825,105.8)
OTG_D_P: D1001.2 J1000.3 U1000.18 | length 6
  S1 (SIG) w0.121: J1000.3@82.4,106.875 82.4,106.4 82.199,106.199 82.199,106.001 82.325,105.875 82.325,105.725 82.199,105.599 82.199,105.312 83.224,104.287 83.224,102.53 83.35,102.404 U1000.18@83.35,102.175
  S10 (SIG) w0.121: v1(82.325,105.8) 82.325,106.35 D1001.2@82.4,106.425
OTG_DATA0: U300.A14 U1000.3 | length 53.7
  S1 (SIG) w0.11: v1(62.8,70.925) 63.275,70.925 63.964,70.236 63.964,66.776 63.888,66.7 U300.A14@63.888,65.195 ; v1@81.363,96.787 U1000.3@81.363,97.412
  S3 (SIG) w0.1: v1(62.8,70.925) 64.025,72.15 64.49,72.615 64.662,72.615 65.102,72.175 65.274,72.175 65.532,72.433 65.532,72.605 64.989,73.148 64.989,73.32 65.247,73.578 65.419,73.578 65.962,73.035 66.134,73.035 66.392,73.293 66.392,73.465 65.849,74.008 65.849,74.18 66.107,74.438 66.279,74.438 66.822,73.895 66.994,73.895 67.252,74.153 67.252,74.325 66.709,74.868 66.709,75.04 66.967,75.298 67.139,75.298 67.682,74.755 67.854,74.755 68.112,75.013 68.112,75.185 67.569,75.728 67.569,75.9 67.827,76.158 67.999,76.158 68.541,75.615 68.713,75.615 68.971,75.873 68.971,76.045 68.428,76.588 68.428,76.76 68.686,77.018 68.858,77.018 69.401,76.475 69.573,76.475 69.831,76.733 69.831,76.905 69.288,77.448 69.288,77.619 69.546,77.877 69.718,77.877 70.261,77.335 70.433,77.335 70.691,77.592 70.691,77.764 70.148,78.307 70.148,78.479 70.406,78.737 70.578,78.737 70.936,78.379 71.108,78.379 71.366,78.637 71.366,78.809 71.111,79.064 71.111,79.236 72.343,80.468 81.375,89.5 81.375,96.65 v1@81.4,96.675
  other v1: 81.375,96.775
OTG_DATA1: U300.D15 U1000.4 | length 53.3
  S1 (SIG) w0.11: U300.D15@64.688,62.795 v1(65.088,63.195) ; U1000.4@81.85,97.425 81.823,97.398 81.823,95.777 v1(82.725,94.875)
  S3 (SIG) w0.1: v1(65.088,63.195) 65.5,63.607 65.5,66.438 65.088,66.85 65.088,66.9 65.017,66.971 63.966,66.971 63.895,67.042 63.895,67.254 63.966,67.325 65.342,67.325 65.413,67.396 65.413,67.608 65.342,67.679 63.966,67.679 63.895,67.75 63.895,67.962 63.966,68.033 65.342,68.033 65.413,68.104 65.413,68.316 65.342,68.387 63.966,68.387 63.895,68.458 63.895,68.67 63.966,68.741 65.342,68.741 65.413,68.812 65.413,69.024 65.342,69.095 64.13,69.095 64.059,69.166 64.059,69.378 64.13,69.449 65.017,69.449 65.088,69.52 65.088,69.725 65.088,70.063 82.725,87.7 v1(82.725,94.875)
OTG_DATA2: U300.A12 U1000.5 | length 53.6
  S1 (SIG) w0.11: U300.A12@62.288,65.195 62.288,65.838 62.875,66.425 62.875,69.125 v1(63.175,69.425) ; U1000.5@82.35,97.4 82.363,97.387 82.363,96.137 v1(82.375,96.125)
  S3 (SIG) w0.1: v1(63.175,69.425) 73.013,79.262 73.048,79.298 73.048,79.47 72.768,79.749 72.768,79.921 73.026,80.179 73.198,80.179 73.699,79.679 73.87,79.679 74.128,79.937 74.128,80.109 73.628,80.609 73.628,80.781 73.886,81.039 74.058,81.039 74.558,80.539 74.73,80.539 74.988,80.797 74.988,80.969 74.488,81.469 74.488,81.641 74.746,81.899 74.918,81.899 75.418,81.399 75.59,81.399 75.848,81.657 75.848,81.829 75.348,82.329 75.348,82.501 75.606,82.759 75.778,82.759 76.278,82.259 76.45,82.259 76.708,82.517 76.708,82.688 76.208,83.189 76.208,83.361 76.466,83.619 76.638,83.619 77.138,83.118 77.31,83.118 77.568,83.376 77.568,83.548 77.068,84.049 77.068,84.22 77.326,84.478 77.498,84.478 77.998,83.978 78.17,83.978 78.428,84.236 78.428,84.408 77.927,84.908 77.927,85.08 78.185,85.338 78.357,85.338 78.858,84.838 79.03,84.838 79.287,85.096 79.287,85.268 78.787,85.768 78.787,85.94 79.045,86.198 79.217,86.198 79.693,85.722 79.865,85.722 80.123,85.98 80.123,86.152 79.927,86.349 79.927,86.521 80.185,86.778 80.357,86.778 80.529,86.778 81.689,87.939 82.375,88.625 v1(82.375,96.125)
OTG_DATA3: U300.F12 U1000.6 | length 53.2
  S1 (SIG) w0.11: U300.F12@62.288,61.195 v1(62.688,61.595) ; U1000.6@82.85,97.4 82.85,96.05 v1(83.775,95.125)
  S3 (SIG) w0.1: v1(62.688,61.595) 62.733,61.64 63.038,61.64 63.443,62.045 66.033,62.045 67.138,63.15 67.138,65.243 79.235,77.34 79.27,77.375 79.27,77.547 78.945,77.873 78.945,78.045 79.203,78.303 79.375,78.303 79.988,77.69 80.16,77.69 80.418,77.948 80.418,78.12 79.805,78.733 79.805,78.905 80.062,79.163 80.234,79.163 80.847,78.55 81.019,78.55 81.277,78.808 81.277,78.98 80.664,79.593 80.664,79.765 80.922,80.023 81.094,80.023 81.707,79.41 81.879,79.41 82.137,79.668 82.137,79.84 82.022,79.955 82.022,80.127 84.175,82.28 84.175,83.119 84.175,94.725 v1(83.775,95.125)
OTG_DATA4: U300.C16 U1000.7 | length 52.9
  S1 (SIG) w0.11: U300.C16@65.488,63.595 v1(65.888,63.995) ; v1@83.363,96.787 U1000.7@83.363,97.412
  S3 (SIG) w0.1: v1(65.888,63.995) 65.888,69.963 66.5,70.575 66.535,70.61 66.535,70.782 66.528,70.79 66.528,70.961 66.786,71.219 66.958,71.219 67.278,70.9 67.45,70.9 67.708,71.158 67.708,71.33 67.388,71.649 67.388,71.821 67.646,72.079 67.818,72.079 68.138,71.76 68.309,71.76 68.567,72.018 68.567,72.19 68.248,72.509 68.248,72.681 68.506,72.939 68.678,72.939 68.997,72.62 69.169,72.62 69.427,72.878 69.427,73.049 69.108,73.369 69.108,73.541 69.366,73.799 69.538,73.799 69.857,73.479 70.029,73.479 70.287,73.737 70.287,73.909 69.968,74.229 69.968,74.401 70.226,74.659 70.397,74.659 70.717,74.339 70.889,74.339 71.147,74.597 71.147,74.769 70.827,75.089 70.827,75.261 71.085,75.519 71.257,75.519 71.577,75.199 71.749,75.199 72.007,75.457 72.007,75.629 71.687,75.949 71.687,76.121 71.945,76.378 72.117,76.378 72.437,76.059 72.609,76.059 72.867,76.317 72.867,76.489 72.547,76.808 72.547,76.98 72.805,77.238 72.977,77.238 73.297,76.919 73.469,76.919 73.726,77.177 73.726,77.349 73.407,77.668 73.407,77.84 73.665,78.098 73.837,78.098 74.156,77.779 74.328,77.779 74.586,78.037 74.586,78.209 74.267,78.528 74.267,78.7 74.525,78.958 74.697,78.958 75.016,78.638 75.188,78.638 75.446,78.896 75.446,79.068 75.127,79.388 75.127,79.56 75.385,79.818 75.557,79.818 75.762,79.612 75.934,79.612 76.192,79.87 76.192,80.042 76.166,80.069 76.166,80.241 77.22,81.295 83.375,87.45 83.375,96.636 v1@83.311,96.7
  other v1: 83.375,96.775
OTG_DATA5: U300.A10 U1000.9 | length 55
  S1 (SIG) w0.11: v1(60.35,69.325) 60.688,68.987 U300.A10@60.688,65.195 ; v1(79.675,92.175) 79.686,92.186 79.686,92.461 80.05,92.825 84.1,92.825 85.1,93.825 85.1,97.85 84.9,98.05 U1000.9@84.475,98.05
  S3 (SIG) w0.1: v1(60.35,69.325) 60.35,72.85 61.863,74.362 61.898,74.398 61.898,74.642 61.84,74.699 61.84,74.943 62.206,75.309 62.45,75.309 62.826,74.933 63.07,74.933 63.435,75.298 63.435,75.542 63.059,75.918 63.059,76.162 63.425,76.528 63.669,76.528 64.045,76.152 64.289,76.152 64.655,76.517 64.655,76.761 64.279,77.137 64.279,77.381 64.644,77.747 64.888,77.747 65.264,77.371 65.508,77.371 65.874,77.736 65.874,77.98 65.498,78.356 65.498,78.6 65.863,78.966 66.107,78.966 66.483,78.59 66.727,78.59 67.093,78.956 67.093,79.199 66.717,79.575 66.717,79.819 67.082,80.185 67.326,80.185 67.702,79.809 67.946,79.809 68.312,80.175 68.312,80.418 67.936,80.794 67.936,81.038 68.301,81.404 68.545,81.404 68.921,81.028 69.165,81.028 69.531,81.394 69.531,81.637 69.218,81.951 69.218,82.194 69.583,82.56 69.827,82.56 70.066,82.322 70.309,82.322 70.675,82.687 70.675,82.931 70.675,83.175 72.698,85.198 v1(79.675,92.175)
OTG_DATA6: U300.E13 U1000.10 | length 53.8
  S1 (SIG) w0.11: U300.E13@63.088,61.995 v1(63.488,62.395) ; U1000.10@84.488,98.562 84.5,98.55 85.1,98.55 v1(85.675,97.975)
  S3 (SIG) w0.1: v1(63.488,62.395) 63.131,62.039 62.636,62.039 62.338,61.74 62.338,61.45 62.543,61.245 67.633,61.245 68.638,62.25 68.638,62.483 70.175,64.02 86.25,80.095 86.25,97.4 v1(85.675,97.975)
OTG_DATA7: U300.C18 U1000.13 | length 53.9
  S1 (SIG) w0.11: U300.C18@67.088,63.595 v1(67.488,63.995) ; U1000.13@84.513,100.037 86.438,100.037 86.975,99.5 86.975,98.006 85.6,96.631 v1(85.6,95.075)
  S3 (SIG) w0.1: v1(67.488,63.995) 67.879,63.995 67.938,64.053 67.938,64.14 68.143,64.345 68.4,64.345 71.265,67.21 71.301,67.245 71.301,67.417 71.116,67.602 71.116,67.774 71.374,68.032 71.546,68.032 72.126,67.451 72.298,67.451 72.556,67.709 72.556,67.881 71.976,68.462 71.976,68.634 72.234,68.892 72.406,68.892 72.986,68.311 73.158,68.311 73.416,68.569 73.416,68.741 72.836,69.321 72.836,69.493 73.094,69.751 73.266,69.751 73.846,69.171 74.018,69.171 74.276,69.429 74.276,69.601 73.695,70.181 73.695,70.353 73.953,70.611 74.125,70.611 74.524,70.212 74.696,70.212 74.954,70.47 74.954,70.642 74.912,70.684 74.912,70.856 76.644,72.588 80.175,76.119 80.175,76.495 85.6,81.92 v1(85.6,95.075)
OTG_DIR: U300.C13 U1000.31 | length 53.5
  S1 (SIG) w0.11: U300.C13@63.088,63.595 v1(63.488,63.995) ; v1@79.088,98.537 U1000.31@79.713,98.537
  S3 (SIG) w0.1: v1(63.488,63.995) 63.9,64.407 63.9,65.625 60.55,68.975 60.205,68.975 60,69.18 60,69.525 59.675,69.85 59.675,79.125 63.638,83.087 63.673,83.123 63.673,83.295 63.535,83.433 63.535,83.605 63.793,83.863 63.965,83.863 64.511,83.316 64.683,83.316 64.941,83.574 64.941,83.746 64.394,84.293 64.394,84.465 64.652,84.723 64.824,84.723 65.371,84.176 65.543,84.176 65.801,84.434 65.801,84.606 65.254,85.153 65.254,85.325 65.512,85.583 65.684,85.583 66.231,85.036 66.403,85.036 66.661,85.294 66.661,85.466 66.114,86.013 66.114,86.185 66.372,86.443 66.544,86.443 67.091,85.896 67.263,85.896 67.521,86.154 67.521,86.326 66.978,86.868 66.978,87.04 67.236,87.298 67.408,87.298 67.542,87.164 67.714,87.164 71.532,90.982 v1(79.075,98.525)